# Altium PCB 96B垂直控制PCB-模拟电路.PcbDoc
Units mil, origin at the board's own origin, x right, y up, seen from the top; angles counter-clockwise.
Board outline 16035 x 9550 mil, 4 copper layers (Top Layer, MidLayer1, MidLayer2, Bottom Layer); 110 components, 82 nets, 410 pads, 11 vias.
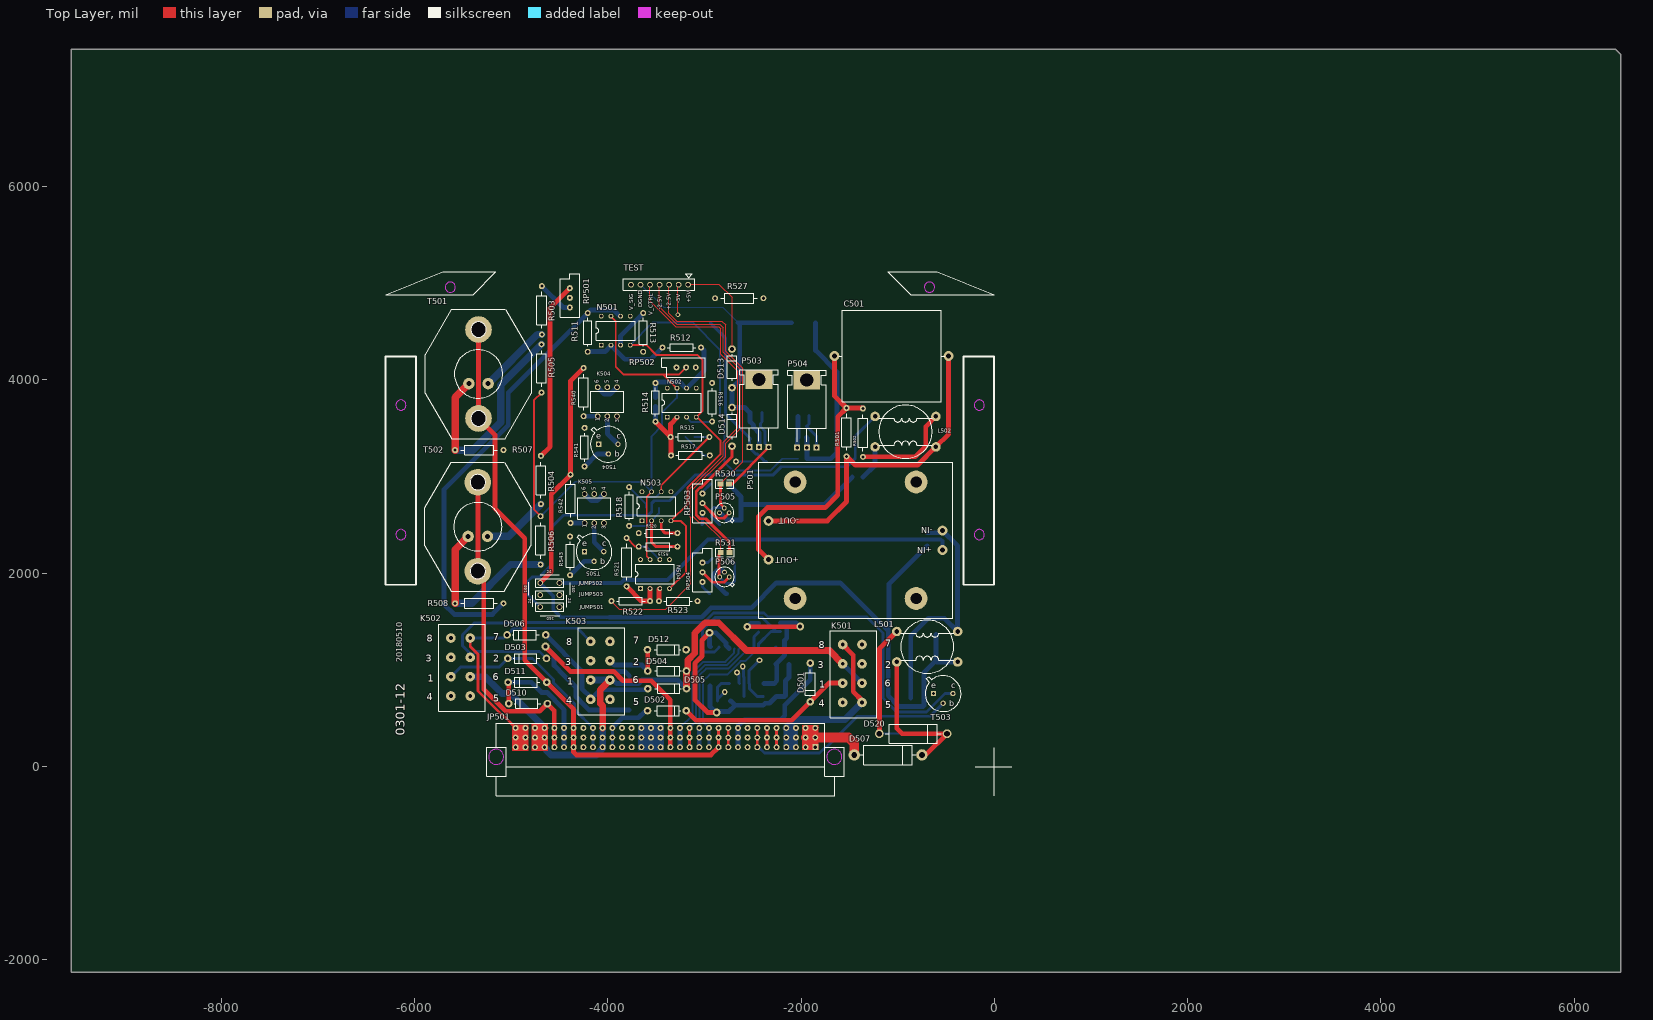
[diagram p0: Top Layer view]
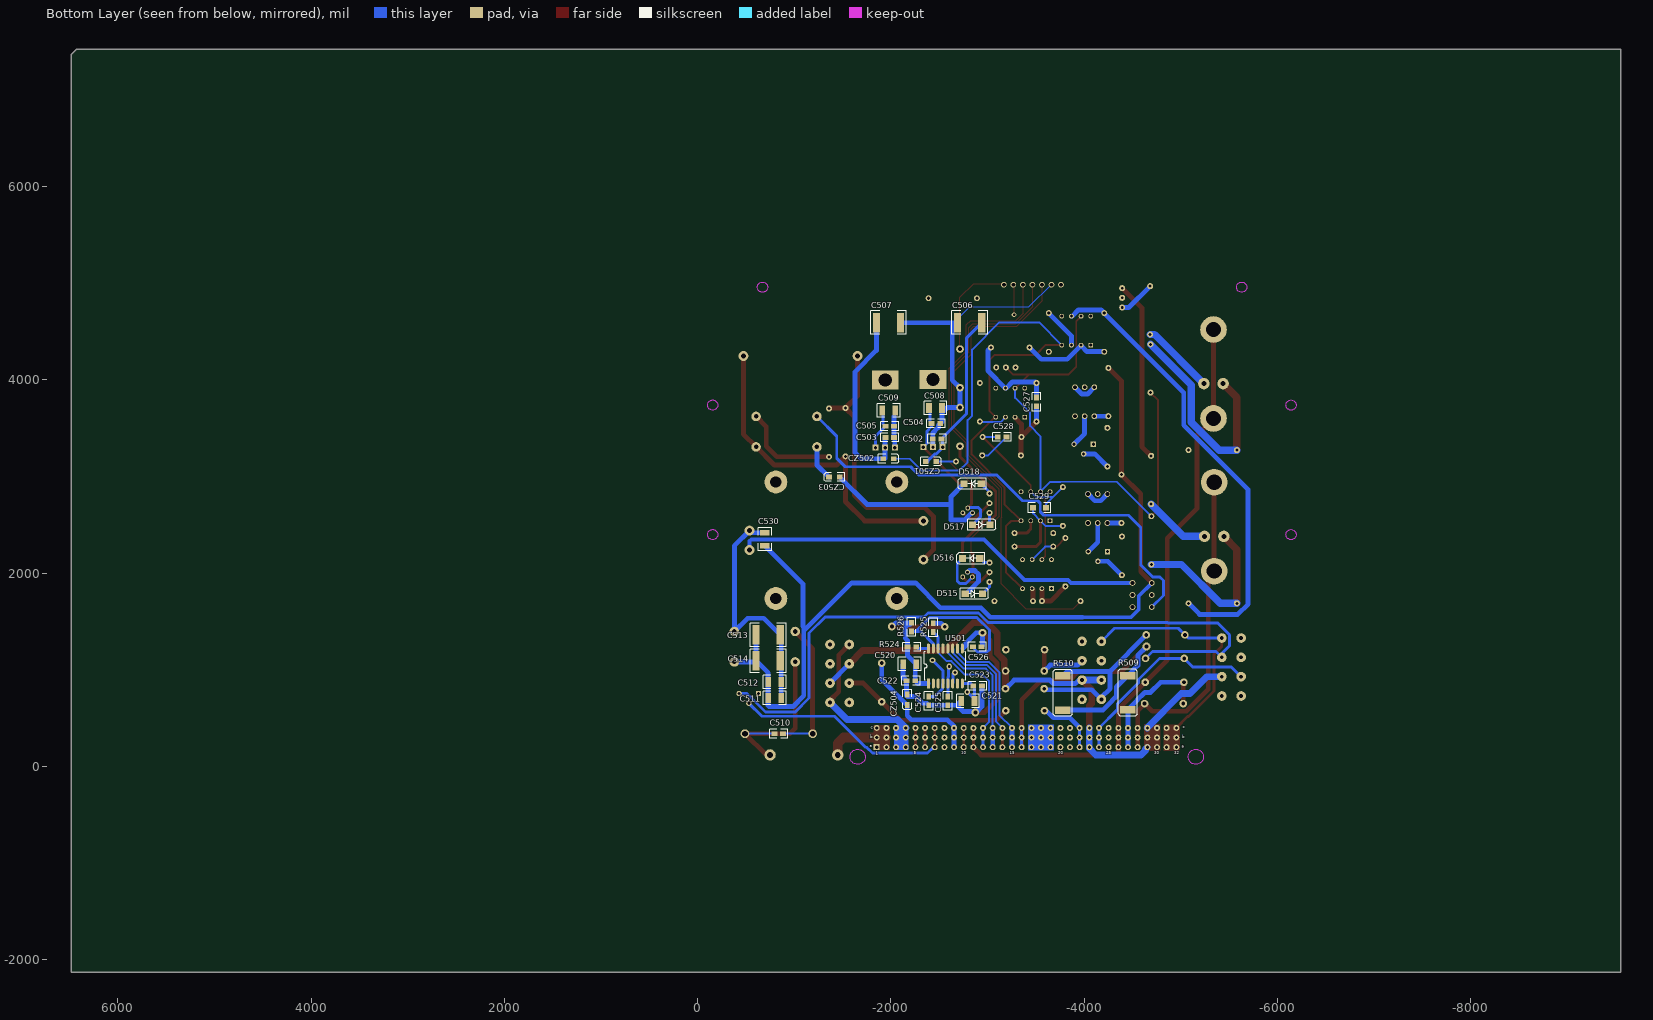
[diagram p1: Bottom Layer view, seen from below]
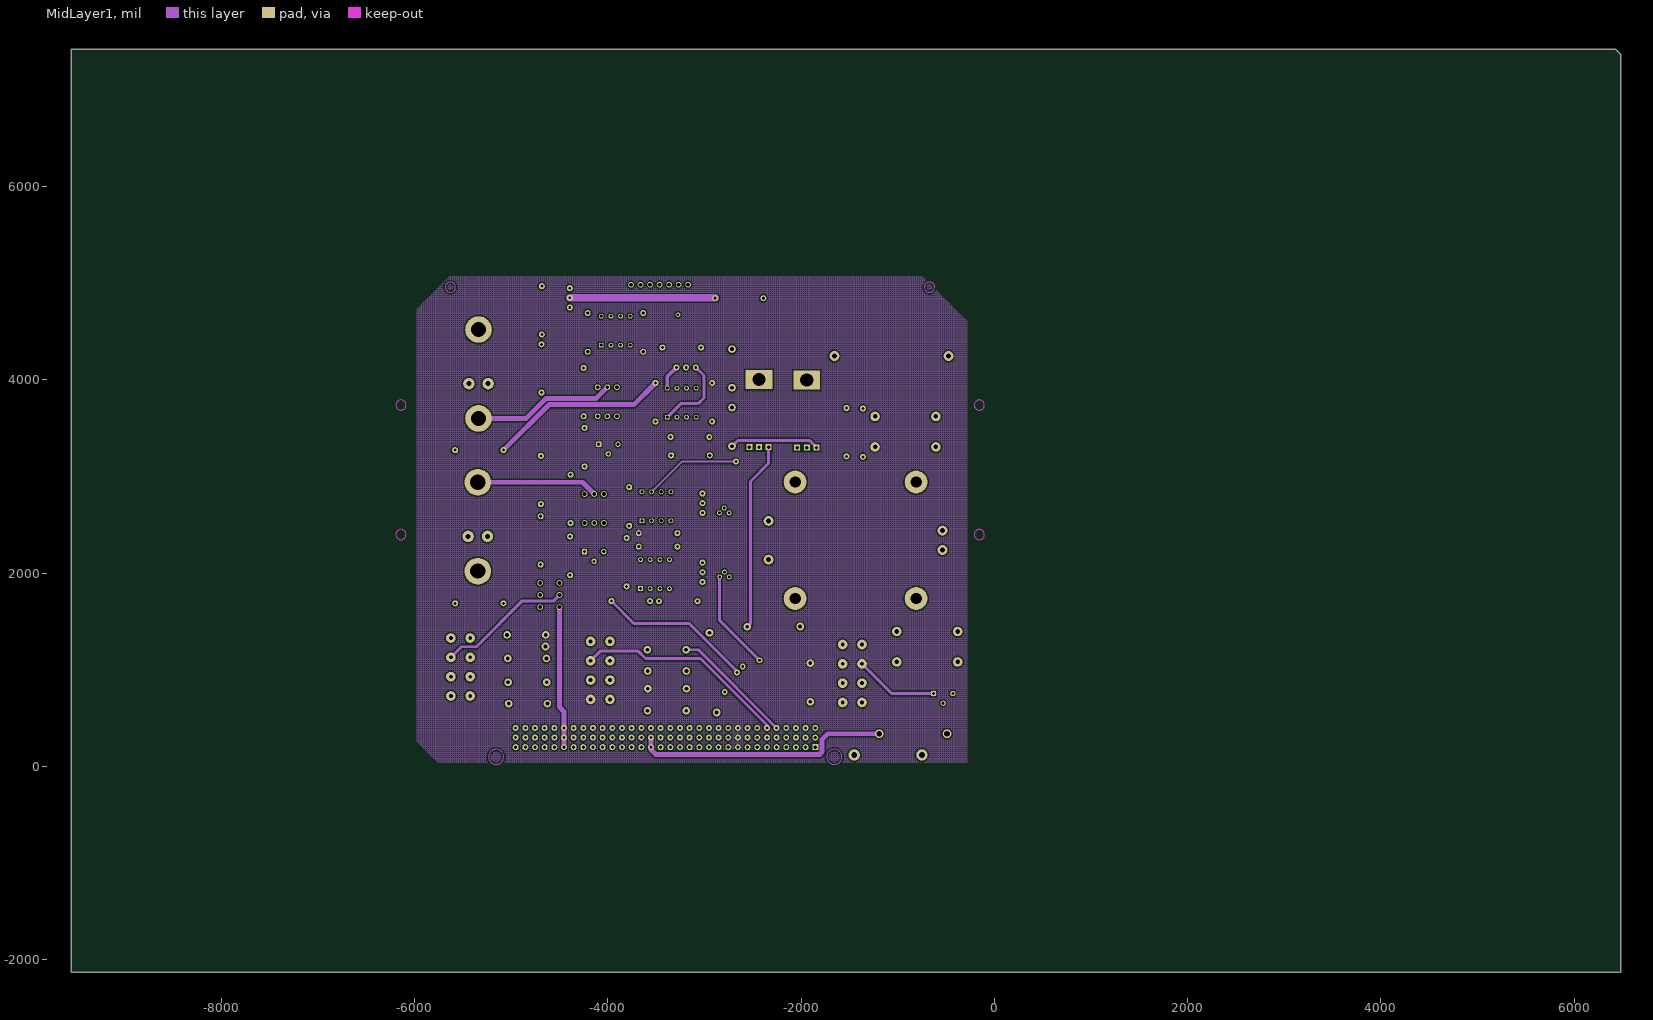
[diagram p2: MidLayer1]
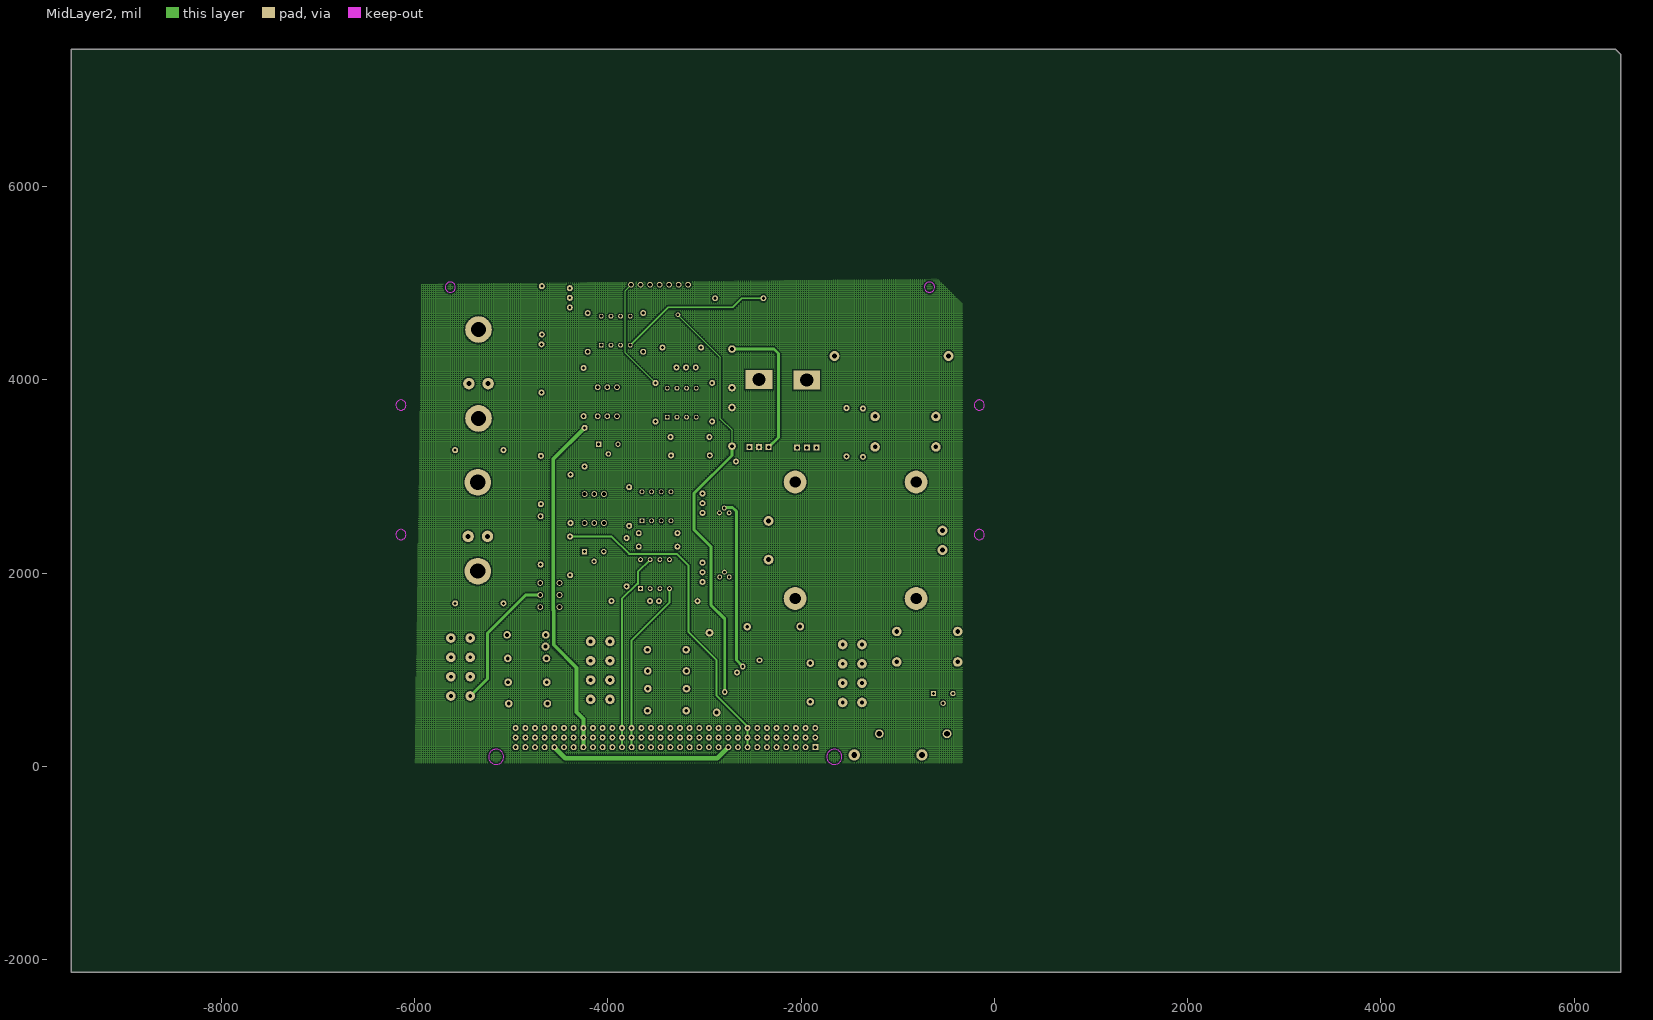
[diagram p3: MidLayer2]

## Layer stack, top to bottom
Top Solder: solder mask 0.4, Solder Resist, Dk 3.5
Top Layer: signal copper 1.4
Dielectric1: core 12.6, FR-4, Dk 4.8
MidLayer1: signal copper 1.4
Dielectric2: prepreg 12.6, FR-4, Dk 4.8
MidLayer2: signal copper 1.4
Dielectric3: core 12.6, FR-4, Dk 4.8
Bottom Layer: signal copper 1.4
Bottom Solder: solder mask 0.4, Solder Resist, Dk 3.5

## Board outline
-9553,-2127 -9553,7423 6427,7423 6482,7368 6482,-2127 -9553,-2127

## Design rules (kind name [scope] priority, off if disabled: settings)
Clearance [All] p1: gap=15 ignorepadtopadclearanceinfootprint=FALSE except(0: Arc-Hole Track-Hole SMDPad-Hole THPad-Hole Via-Hole Fill-Hole Poly-Hole Region-Hole Text-Hole)
FabricationTestpoint [(IsPad And (OnTopLayer Or OnBottomLayer))] p1: side=3 testpointundercomponent=TRUE minsize=40 maxsize=100 preferedsize=60 minholesize=0 maxholesize=40 preferedholesize=32 testpointgrid=1 allowsidetop=TRUE allowsidebottom=TRUE usegrid=TRUE gridtolerance=0.01
HoleSize [All] p1: absolutevalues=TRUE maxlimit=393.7 minlimit=1 maxpercent=80.000 minpercent=20.000
PolygonConnect [All] p1: connectstyle=Relief reliefconductorwidth=10 reliefentries=4 polygonreliefangle="90 Angle" airgapwidth=10
RoutingVias [All] p1: holewidth=28 width=50 viastyle="Through Hole" minholewidth=28 minwidth=50 maxholewidth=393.7 maxwidth=787.4
SilkToSolderMaskClearance [IsPad] p1 off: minsilkscreentomaskgap=10 clearancetoexposedcopper=TRUE
SolderMaskExpansion [All] p1: expansion=4
Width [All] p1: maxlimit=157.48 minlimit=10 preferedwidth=10
27 further rules are at their usual default settings.

## Components (designator, comment, footprint, x,y, rotation, side; value= is the part's Value field where it differs from the comment)
C501 "C401-400V-2μF±5%" C400V2U -474,4248 r180 top
C502 "CT41-0805-2R1-50V-105K" 0805 -2433,3391 r180 bottom
C503 "CT41-0805-2R1-50V-105K" 0805 -1942.4,3405 r180 bottom
C504 "CT41-0805-2R1-50V-105K" 0805 -2512,3551 r0 bottom
C505 "CT41-0805-2R1-50V-105K" 0805 -1942.4,3521 r180 bottom
C506 "CT41-2220-2R1-50V-226K" 2220 -2940,4592 r0 bottom
C507 "CT41-2220-2R1-50V-226K" 2220 -2101,4592 r0 bottom
C508 "CT41-1210-2R1-50V-106K" 1210 -2395,3710 r180 bottom
C509 "CT41-1210-2R1-50V-106K" 1210 -2045,3685 r0 bottom
C510 "CT41-0805-2R1-50V-105K" 0805 -794.51,339.99 r180 bottom
C511 "CT41-1210-2R1-50V-475K" 1210 -730,710 r180 bottom
C512 "CT41-1210-2R1-50V-475K" 1210 -865,875 r0 bottom
C513 "CT4901-2220P2-2C1-63V-336M-L5.0" 2220 -604.68,1365.08 r180 bottom value=47u/64V
C514 "CT4901-2220P2-2C1-63V-336M-L5.0" 2220 -604.68,1095.08 r180 bottom value=47u/64V
C520 "CT41-1210-2R1-50V-106K" 1210 -2261.95,1058.98 r0 bottom
C521 "CT41-1210-2R1-50V-106K" 1210 -2728.95,678.98 r180 bottom
C522 "CT41-0805-2R1-50V-104K" 0805 -2251.95,886.98 r0 bottom
C523 "CT41-0805-2R1-50V-104K" 0805 -2941.95,833.98 r0 bottom
C524 "CT41-0805-2R1-50V-104K" 0805 -2391.95,724.98 r270 bottom
C525 "CT41-0805-2R1-50V-104K" 0805 -2588.95,632.98 r90 bottom
C526 "CT41-0805-2R1-50V-104K" 0805 -2938.95,1238.98 r0 bottom
C527 "CT41-0805-2R1-50V-104K" 0805 -3506.92,3819 r270 bottom
C528 "CT41-0805-2R1-50V-105K" 0805 -3195.49,3410.01 r0 bottom
C529 "CT41-1206-2R1-50V-155K" 1206 -3605.92,2678 r0 bottom
C530 "CT41-1210-2R1-50V-475K" 1210 -695,2285 r90 bottom
CZ501 "MLCB2B3216-122B" MLCB2B3216 -2470,3155 r0 bottom
CZ502 "MLCB2B3216-122B" MLCB2B3216 -2030.4,3185 r0 bottom
CZ503 "MLCB2B3216-122B" MLCB2B3216 -1360,2995 r180 bottom
CZ504 "MLCB2B3216-122B" MLCB2B3216 -2168.95,635.98 r90 bottom
D501 "1N4007" DO-0.4 -1905,1070 r270 top
D502 "1N4007" DO-0.4 -3589,578 r0 top
D503 "1N4007" DO-0.4 -4635,1119 r180 top
D504 "1N4007" DO-0.4 -3587,989 r0 top
D505 "1N4007" DO-0.4 -3586,806 r0 top
D506 "1N4007" DO-0.4 -4642,1362 r180 top
D507 "P600D" P600D -1450,120 r0 top
D510 "1N4007" DO-0.4 -4625,651 r180 top
D511 "1N4007" DO-0.4 -4632,872 r180 top
D512 "1N4007" DO-0.4 -3590,1209 r0 top
D513 "1N4007" DO-0.4 -2715,3920 r90 top
D514 "1N4007" DO-0.4 -2715,3315 r90 top
D515 "LL4148(LL-34)" D-LL34 -2769,1788 r180 bottom
D516 "LL4148(LL-34)" D-LL34 -2920,2154 r0 bottom
D517 "LL4148(LL-34)" D-LL34 -2845,2502 r180 bottom
D518 "LL4148(LL-34)" D-LL34 -2936,2926 r0 bottom
D520 "1.5KE39A" DIODE-0.7 -840,340 r0 top
JP501 "6032-C096MS-1C1" AMP-174111-1 -1653.54,100 r0 top
JUMP501 "JP" JP -4700,1650 r0 top
JUMP502 "JP" JP -4700,1900 r0 top
JUMP503 "JP" JP -4500,1775 r180 top
K501 "JZC-078M/027-01-II" JZC-078M -1570,863 r0 top
K502 "JZC-078M/027-01-II" JZC-078M -5624,930 r0 top
K503 "JZC-078M/027-01-II" JZC-078M -4178,895 r0 top
K504 "JGW-5215MA" JGW-5215MA -4105,3625 r90 top
K505 "JGW-5215MA" JGW-5215MA -4240,2520 r90 top
L501 "GM10" GM10 -695,1240 r0 top
L502 "GM10" GM10 -920,3465 r180 top
N501 "G7FOP07MJ" DIP8 -4067.92,4360 r90 top
N502 "G7FOP07MJ" DIP8 -3385,3615 r90 top
N503 "G7FOP07MJ" DIP8 -3646.92,2543 r90 top
N504 "G7FOP07MJ" DIP8 -3661.92,1841 r90 top
P501 "MD10CW24S160ED" MD10CW24S160ED -2062,2944 r180 top
P503 "G7W7805(TO257)" "TO-220H - MODIFY" -2410,3655 r0 top
P504 "G7W7905(TO257)" "TO-220H - MODIFY" -1914.4,3650 r0 top
P505 "LM136AH-2.5" TO-46 -2745,2625 r0 top
P506 "LM136AH-2.5" TO-46 -2743,1962 r0 top
R501 "RJ15-0.5W-200KΩ±5%" RES-0.5W -1530,3210 r90 top
R502 "RJ15-0.5W-100Ω±5%" RES-0.5W -1360,3705 r270 top
R503 "RJ15-0.5W-160Ω±5%" RES-0.5W -4683,4471 r90 top
R504 "RJ15-0.5W-160Ω±5%" RES-0.5W -4693,3215 r270 top
R505 "RJ15-0.5W-62KΩ±5%" RES-0.5W -4686,4369 r270 top
R506 "RJ15-0.5W-62KΩ±5%" RES-0.5W -4695,2590 r270 top
R507 "RJ15-0.5W-4.7KΩ±5%" RES-0.5W -5080,3274 r180 top
R508 "RJ15-0.5W-4.7KΩ±5%" RES-0.5W -5080,1689 r180 top
R509 "RJ75 - 0.5W-200kΩ±0.1%" RJ75-0.5W -4451,587 r90 bottom
R510 "RJ75 - 0.5W-12kΩ±0.1%" RJ75-0.5W -3778,584 r90 bottom
R511 "RJ14-0.25W-33K±5%" RES-0.25W -4207.92,4292 r90 top
R512 "RJ14-0.25W-33K±5%" RES-0.25W -3035,4335 r180 top
R513 "RJ14-0.25W-16K±5%" RES-0.25W -3633.92,4292 r90 top
R514 "RJ14-0.25W-150KΩ±5%" RES-0.25W -3506.92,3569 r90 top
R515 "RJ14-0.25W-150KΩ±5%" RES-0.25W -2950,3410 r180 top
R516 "RJ14-0.25W-10KΩ±5%" RES-0.25W -2920,3970 r270 top
R517 "0" RES-0.25W -2945,3220 r180 top
R518 "RJ14-0.25W-15KΩ±5%" RES-0.25W -3778.92,2491 r90 top
R519 "RJ14-0.25W-10KΩ±5%" RES-0.25W -3280,2275 r180 top
R520 "RJ14-0.25W-6.2KΩ±5%" RES-0.25W -3680,2415 r0 top
R521 "RJ15-0.5W-200KΩ±5%" RES-0.5W -3805,1865 r90 top
R522 "RJ14-0.25W-100KΩ±5%" RES-0.25W -3963,1712 r0 top
R523 "RJ14-0.25W-51KΩ±5%" RES-0.25W -3070.92,1711 r180 top
R524 "RMK2012(0805)-K-B-512-F" 0805 -2261.95,1235.98 r0 bottom
R525 "RMK2012(0805)-K-B-512-F" 0805 -2438.95,1391.98 r90 bottom
R526 "RMK2012(0805)-K-B-512-F" 0805 -2213.95,1396.98 r90 bottom
R527 "RJ16S-1W-470Ω±5%" RJ16S-1W -2390,4846 r180 top
R530 "RMK2012(0805)-K-B-252-F" 0805 -2745,2925 r180 top
R531 "RMK2012(0805)-K-B-252-F" 0805 -2742,2215 r180 top
R540 "RJ15-0.5W-2KΩ±5%" RES-0.5W -4250,4125 r270 top
R541 "RJ14-0.25W-3.3KΩ±5%" RES-0.25W -4240,3505 r270 top
R542 "RJ15-0.5W-2KΩ±5%" RES-0.5W -4385,3020 r270 top
R543 "RJ14-0.25W-3.3KΩ±5%" RES-0.25W -4390,2380 r270 top
RP501 "TC183-X-100Ω" VR5 -4393,4750 r90 top
RP502 "TC183-W-20KΩ" VR5 -3090,4130 r180 top
RP503 "TC183-W-10KΩ" VR5 -3020,2625 r90 top
RP504 "TC183-W-10KΩ" VR5 -3020,1910 r90 top
T501 "3DD4H-T" 3DD4H-T -5338,4062 r90 top
T502 "3DD4H-T" 3DD4H-T -5345,2482 r90 top
T503 "3DG182J(绿点)" T039 -530,755 r0 top
T504 "3DG182J(绿点)" T039 -3995,3335 r0 top
T505 "3DG182J(绿点)" T039 -4142,2224 r0 top
TEST "TEST-POINT" TEST-POINT -3169,4986 r180 top
U501 "DAC7614UB" DAC7614[SOIC] -2388.95,858.98 r90 bottom

## Footprints (in the part's own frame and the unit in brackets; to place one, negate y for a bottom-side part, rotate by r counter-clockwise, add the part's x,y. Pads: shape width x height; smd on the part's side, far side on the other; paste and mask are expansions set on the pad)
3DD4H-T [mm] "3DD4H-T"
  round 7 hole 4: 1(-11.684,0) 1(11.684,0)
  round 3 hole 1.3: 2(-2.54,2.54) 3(-2.54,-2.54)
  silkscreen extent -17,-14.07 17,14.02
0805 [mil]
  rect 60x50 smd: 1(0.49,0.01) 2(90.49,0.01)
  silkscreen extent -50,-45 140,45
1206 [mil]
  rect 60x60 smd: 1(0,0) 2(135,0)
  silkscreen extent -50,-50 185,50
1210 [mil]
  rect 60x100 smd: 1(0,0) 2(135,0)
  silkscreen extent -50,-70 185,70
2220 [mil]
  rect 75x200 smd: 1(0.32,-0.08) 2(250.32,-0.08)
  silkscreen extent -60,-125 310,120
AMP-174111-1 [mil] "AMP-174111-1"
  rect 62x62 hole 32: 1A(-200,100)
  round 62 hole 32: 1B(-200,200) 1C(-200,300) 2A(-300,100) 2B(-300,200) 2C(-300,300) 3A(-400,100) 3B(-400,200) 3C(-400,300) 4A(-500,100) 4B(-500,200) 4C(-500,300) 5A(-600,100) 5B(-600,200) 5C(-600,300) 6A(-700,100) 6B(-700,200) 6C(-700,300) 7A(-800,100) 7B(-800,200) 7C(-800,300) 8A(-900,100) 8B(-900,200) 8C(-900,300) 9A(-1000,100) 9B(-1000,200) 9C(-1000,300) 10A(-1100,100) 10B(-1100,200) 10C(-1100,300) 11A(-1200,100) 11B(-1200,200) 11C(-1200,300) 12A(-1300,100) 12B(-1300,200) 12C(-1300,300) 13A(-1400,100) 13B(-1400,200) 13C(-1400,300) 14A(-1500,100) 14B(-1500,200) 14C(-1500,300) 15A(-1600,100) 15B(-1600,200) 15C(-1600,300) 16A(-1700,100) 16B(-1700,200) 16C(-1700,300) 17A(-1800,100) 17B(-1800,200) 17C(-1800,300) 18A(-1900,100) 18B(-1900,200) 18C(-1900,300) 19A(-2000,100) 19B(-2000,200) 19C(-2000,300) 20A(-2100,100) 20B(-2100,200) 20C(-2100,300) 21A(-2200,100) 21B(-2200,200) 21C(-2200,300) 22A(-2300,100) 22B(-2300,200) 22C(-2300,300) 23A(-2400,100) 23B(-2400,200) 23C(-2400,300) 24A(-2500,100) 24B(-2500,200) 24C(-2500,300) 25A(-2600,100) 25B(-2600,200) 25C(-2600,300) 26A(-2700,100) 26B(-2700,200) 26C(-2700,300) 27A(-2800,100) 27B(-2800,200) 27C(-2800,300) 28A(-2900,100) 28B(-2900,200) 28C(-2900,300) 29A(-3000,100) 29B(-3000,200) 29C(-3000,300) 30A(-3100,100) 30B(-3100,200) 30C(-3100,300) 31A(-3200,100) 31B(-3200,200) 31C(-3200,300) 32A(-3300,100) 32B(-3300,200) 32C(-3300,300)
  silkscreen extent -3600,-400 100,350
C400V2U [mil] "C401-400V-2μFJ"
  round 102 hole 51: 1(0,0) 2(1181,0)
  silkscreen extent 41,-472 1139,473
D-LL34 [mm]
  rect 1.9x1.8 smd: 1(0,0) 2(4.572,0)
  silkscreen extent -1.28,-1.5 6.1,1.5
DAC7614[SOIC] [mm]
  rect 2.6x0.8 smd: 1(0,0)
  oval 2.6x0.8 smd: 2(0,-1.27) 3(0,-2.54) 4(0,-3.81) 5(0,-5.08) 6(0,-6.35) 7(0,-7.62) 8(0,-8.89) 9(9.2,-8.89) 10(9.2,-7.62) 11(9.2,-6.35) 12(9.2,-5.08) 13(9.2,-3.81) 14(9.2,-2.54) 15(9.2,-1.27) 16(9.2,0)
  silkscreen extent 0.8,-9.72 8.4,1.09
DIODE-0.7 [mm] "Zener Diode; 2 Leads"
  round 2.3 hole 1.5: 1(-8.89,0) 2(8.89,0)
  silkscreen extent -7.37,-2.54 7.37,2.54
DIP8 [mil]
  rect 50x50 hole 32: 1(0,0)
  round 50 hole 32: 2(0,-100) 3(0,-200) 4(0,-300) 5(300,-300) 6(300,-200) 7(300,-100) 8(300,0)
  silkscreen extent 50,-350 250,50
DO-0.4 [mm]
  round 2 hole 1: 1(0,0) 2(10.16,0)
  silkscreen extent 1.78,-1.27 8.76,1.27
GM10 [mm]
  round 2.5 hole 1.2: 1(-8,-4) 2(8,-4) 3(-8,4) 4(8,4)
  silkscreen extent -7,-7 7,7
JGW-5215MA [mm]
  round 1.5 hole 1: 1(0,0) 2(0,-2.54) 3(0,-5.08) 4(7.62,-5.08) 5(7.62,-2.54) 6(7.62,0)
  silkscreen extent 1.02,-6.84 6.6,1.76
JP [mm]
  round 1.5 hole 1: 1(0,0) 2(5.08,0)
  silkscreen extent -1.17,-1.12 6.25,1.12
JZC-078M [mm]
  round 2.524 hole 1: 1(0,0) 2(5.08,5.08) 3(0,5.08) 4(0,-5.08) 5(5.08,-5.08) 6(5.08,0) 7(5.08,10.16) 8(0,10.16)
  silkscreen extent -3.2,-9.12 8.99,13.74
MD10CW24S160ED [mm] "DC24V-DC160V力源兴达"
  round 6 hole 3: 0(-31.8,30.6) 0(-31.8,0) 0(0,30.6) 0(0,0)
  round 2.591 hole 1.295: 1(-38.735,17.865) 2(-38.735,12.76) 3(6.96,10.22) 4(6.96,20.405)
  silkscreen extent -41.38,-5.2 9.6,35.8
MLCB2B3216 [mil]
  rect 60x50 smd: 1(0,0) 2(110,0)
  silkscreen extent -50,-45 160,45
P600D [mm] "P600D"
  round 3 hole 1.5: 1(0,0) 2(17.78,0)
  silkscreen extent 1.52,-2.54 16.26,2.54
RES-0.5W [mil]
  round 62 hole 32: 1(0,0) 2(500,0)
  silkscreen extent 65,-50 440,50
RES-0.25W [mil]
  round 62 hole 32: 1(0,0) 2(400,0)
  silkscreen extent 55,-40 350,40
RJ16S-1W [mil]
  round 62 hole 32: 1(0,0) 2(500,0)
  silkscreen extent 65,-50 440,50
RJ75-0.5W [mm]
  rect 2x4 smd: 1(0,0) 2(9,0)
  silkscreen extent -1.65,-2.54 10.67,2.54
T039 [mm]
  round 1.4 hole 0.8: 1(2.54,0) 2(0,-2.54)
  rect 1.4x1.4 hole 0.8: 3(-2.54,0)
  silkscreen extent -4.7,-4.7 4.7,4.7
TEST-POINT [mm]
  round 1.5 hole 1: 1(0,0) 2(2.5,0) 3(5,0) 4(7.5,0) 5(10,0) 6(12.5,0) 7(15,0)
  silkscreen extent -1.78,-2.82 17.02,1.52
TO-46 [mil]
  round 50 hole 28: 1(0,0) 2(-50,50) 3(-100,0)
  silkscreen extent -150,-100 50,100
"TO-220H - MODIFY" [mm]
  rect 7x5 hole 3.5: 0(-0.66,8.88)
  rect 1.575x1.575 hole 0.889: 1(-3.2,-8.9) 2(-0.66,-8.9) 3(1.88,-8.9)
  silkscreen extent -5.74,-7.38 4.42,11.42
VR5 [mil]
  round 62 hole 28: 1(0,0) 2(100,0) 3(200,0)
  silkscreen extent -100,-100 350,100

## Part data
C501: library part CaP1
C502 C504 C505: library part Cap_X_1, "1uF"
C503: library part Cap_X_1
C506 C507: library part Cap_Pol, "22uF"
C508 C509: library part Cap_Pol, "10uF"
C510: library part CAP, "1uF"
C511 C512: library part CAP, "4.7uF"
C513 C514: library part "Cap Pol2", "33uF", LatestRevisionDate=17-Jul-2002, LatestRevisionNote="Re-released for DXP Platform.", PackageReference=POLAR0.8, Published=8-Jun-2000, Publisher="Altium Limited"
C520 C521: library part Cap_X_2, "10uF"
C522 C523 C524 C525 C526 C527: library part Cap_X_2, "0.1uF"
C528: library part Cap_X_2, "1uF"
C529: library part Cap_X_2, "1.5uF"
C530: library part Cap_X_2
CZ501 CZ502 CZ503 CZ504: library part CZH
D515 D516 D517 D518: library part IN4148, "SMK4148(LL-34)"
D520: library part "Diode 11DQ03", "Schottky Rectifier", Code_JEDEC=DO-204-AL, ComponentLink1Description="Manufacturer Link", ComponentLink1URL=http://www.irf.com/, ComponentLink2Description=Datasheet, ComponentLink2URL=http://www.irf.com/product-info/datasheets/data/11dq03.pdf, DatasheetDocument=Dec-1997, LatestRevisionDate=17-Jul-2002, LatestRevisionNote="Re-released for DXP Platform.", PackageReference=DO-204AL, Published=8-Jun-2000, Publisher="Altium Limited"
JP501: library part AMP-174111-1
K501 K502 K503: library part Relay-DPDT
L501 L502: library part L-GONGMO
P501: "力源兴达，电源引脚做反了"
P503: library part MC7805T
P504: library part MC7905T
R501 R502 R503 R540 R542: library part R-0.5W
R504: library part Rx, "RJ15-0.5W-180Ω±5%-±100×10-6/K-SJ/T10872-2000"
R505 R506: library part Rx, "RJ15-0.5W-62KΩ±5%-±100×10-6/K-SJ/T10872-2000"
R507 R508: library part Rx
R509: library part R-0.5W, "RJ75 - 0.5W-200kΩ±0.1%±25×10^-6/K - GJB1929-1994"
R510: library part R-0.5W, "RJ75 - 0.5W-12kΩ±0.1%±25×10^-6/K - GJB1929-1994"
R511 R512 R513 R514 R515 R516 R517 R518 R519 R520 R521 R522 R523 R541 R543: library part R-0.25W
R524 R525 R526: library part RES2, "5.1K"
R527: library part R-5W
R530 R531: library part RES2, "2.5K"
RP501 RP502 RP503 RP504: library part Rp
T501 T502: "GB4314-84"
T503 T504 T505: library part 3DG182
U501: library part DAC7614

## Via types
v1: diameter 60, hole 30, Top Layer to Bottom Layer, 5 vias
v2: diameter 80, hole 40, Top Layer to Bottom Layer, 5 vias
v3: diameter 50, hole 28, Top Layer to Bottom Layer, 1 vias

## Nets (pads, with @x,y where several pads share a name; then routed paths per layer and width w, separated by ;. In a path a pad name is that pad's centre, name@x,y a point inside that pad or via, vN(x,y) a via of type N, cw(c..) or ccw(c..) an arc to the next point about the centre after c; other vN are vias at no path point)
12L1_1: D511.1 JP501.11A JP501.11B JP501.11C JP501.26A JP501.26B JP501.26C K504.5 T501.1 | length 7994
  Top Layer w30: JP501.11A JP501.11B JP501.11C
  Top Layer w50: T501.1@-5338,4522 -5338,3602 -5166,3430 -5166,2669 -4860,2363 -4860,1100 D511.1 -4353.54,593.54 JP501.26C JP501.26B JP501.26A -4353.54,148.54 -4325,120 -2933.13,120 -2853.54,199.59 JP501.11A
  MidLayer1 w50: T501.1@-5338,3602 -4843.92,3602 -4635.92,3810 -4120,3810 K504.5 ; JP501.26A@-4353.54,199.59 JP501.26A ; JP501.11A@-2853.54,199.59 JP501.11A
12L2_1: D510.1 JP501.10A JP501.10B JP501.10C JP501.28A JP501.28B JP501.28C K505.5 T502.1 | length 6786.9
  Top Layer w30: JP501.10A JP501.10B JP501.10C
  Top Layer w50: T502.1@-5345,2942 -5345,2022 -5284,1961 -5284,797.75 -5057.88,571.63 -4704.37,571.63 D510.1 -4553.54,579.54 JP501.28C JP501.28B JP501.28A
  MidLayer1 w50: T502.1@-5345,2942 -4262,2942 K505.5
  MidLayer2 w50: JP501.28A -4553.54,199.59 -4438.95,85 -2868.13,85 -2753.54,199.59 JP501.10A
12L_H: D510.2 D511.2 JP501.27A JP501.27B JP501.27C JUMP501.2 R509.1 | length 2799.6
  Top Layer w30: D511.2 D511.2@-5025,865
  Top Layer w50: D510.2 D511.2@-5025,865 ; JP501.27A@-4453.54,199.59 JP501.27A
  MidLayer1 w50: JUMP501.2 -4500,615 -4453.54,568.54 JP501.27C JP501.27B JP501.27A
  Bottom Layer w30: D510.2@-5032,658 D510.2
  Bottom Layer w50: D510.2@-5033,643 D510.2 ; D511.2 -4790.74,872 -4684.74,766 -4627.75,766 -4545.63,683.88 -4545.63,681.63 R509.1 ; JP501.27A JP501.27B JP501.27C R509.1@-4453.54,584.46
26VGND: C510.2 D520.1 JP501.17A JP501.17B JP501.17C JP501.18A JP501.18B JP501.18C JP501.19A JP501.19B JP501.19C L501.3 | length 4215.3
  Top Layer w50: D520.1 -1190,1217.44 L501.3
  MidLayer1 w50: JP501.18B JP501.18A -3553.54,173.54 -3505,125 -1805,125 -1805,129.97 -1782.54,152.43 -1782.54,282.46 -1725,340 D520.1
  Bottom Layer w20: D520.1 C510.2
  Bottom Layer w50: JP501.18A JP501.18B
26VGND1: C511.2 C512.1 C513.2 C514.2 C530.2 L501.4 P501.2 | length 2537.6
  Bottom Layer w50: C511.2 C512.1 -865,1355 C513.2 -685,1535 -517.56,1535 L501.4 -380.04,2284.66 P501.2 -558.65,2420 C530.2
160V: C501.2 P501.4 R501.2 R502.1 | length 3106.2
  Top Layer w50: P501.4 -2440,2244.62 -2440,2590 -2350,2680 -1750,2680 -1620,2810 -1620,3620 R501.2 ; C501.2 -1655,3835 R501.2 ; -1445,3707.5 -1447.5,3710 ; R502.1 -1365,3710 -1447.5,3710 ; R501.2 -1447.5,3710
+2.5V: C525.2 D517.1 P505.2 R530.2 TEST.3 U501.5 | length 5445.9
  Top Layer w10: TEST.3@-3367.85,4991 -3367.85,4692.85 -3285,4610 -2820,4610 -2780,4570 -2780,4295 -2605,4120 -2605,3154.29 -2834.3,2924.99 R530.2
  Top Layer w30: R530.2 -2835.49,2715.49 P505.2
  MidLayer2 w30: P505.2 -2790,2680 -2709,2680 -2670,2641 -2670,1102 v1(-2604,1036)
  Bottom Layer w30: D517.1 -2929,2586 -2929,2655 -2904,2680 -2800,2680 P505.2 ; v1(-2604,1036) -2598,1030 -2598,931.25 -2588.95,922.2 U501.5 ; C525.2 U501.5@-2588.94,858.97
+5V: C504.2 C508.1 C520.1 C522.1 D513.2 P503.3 R524.2 R525.2 R526.2 R530.1 TEST.1 U501.1 | length 7214.5
  Top Layer w10: TEST.1@-3171,4991 -2851,4991 -2715,4855 D513.2
  Top Layer w30: R530.1 -2711.17,2924.99 -2335.98,3300.18 P503.3
  Top Layer w50: v2(-2557,1446) -2012,1446 v2(-2010,1448)
  MidLayer1 w30: v2(-2557,1446) -2525,1478 -2525,2950 -2335.98,3139.02 P503.3
  MidLayer2 w30: D513.2 -2282,4320 -2235,4273 -2235,3405.59 P503.3
  Bottom Layer w30: C508.1@-2404,3662 -2404,3568.5 C504.2 -2421.51,3517.2 -2373.49,3469.18 -2373.49,3343.61 -2374.98,3343.61 P503.3
  Bottom Layer w50: v2(-2557,1446) -2520.54,1482.46 R525.2 ; U501.1@-2383.2,858.98 -2279.45,858.98 C522.1 -2251.46,1048.49 C520.1 -2261.95,1060.54 -2171.46,1151.03 R524.2 -2171.46,1305.86 -2148.94,1328.38 -2148.94,1444.03 -2172.37,1467.46 -2193.94,1467.46 R526.2 -2049.46,1487.46 v2(-2010,1448)
+15V: CZ501.1 JP501.21A JP501.21B JP501.21C N501.7 N502.7 N503.7 N504.7 R505.2 R506.1 RP502.2 | length 9404.6
  Top Layer w20: R506.1 -4765,2660 -4765,3790 R505.2 ; N501.7 -3917.92,4610 -3917.92,4137.92 -3835,4055 -3425,4055 ; N504.7 -3596.92,2176 -3596.92,2793 N503.7 ; N502.7 -3425,4055 ; RP502.2 -3190,4129.59 -3264.59,4055 -3425,4055
  MidLayer1 w20: N503.7 -3234.92,3155 v1(-2675,3155)
  MidLayer2 w20: JP501.21A JP501.21B JP501.21C -3853.54,1734.74 -3697.28,1891 -3689,1891 -3689,2013.92 N504.7
  Bottom Layer w20: R506.1 -4338,2947 -3755.73,2947 -3753.73,2945 -3648.92,2945 N503.7 -3546.92,3418.08 -3440,3525 -3440,3660 -3285,3815 N502.7 ; v1(-2675,3155) CZ501.1
+26V: D507.1 JP501.1A JP501.1B JP501.1C JP501.2A JP501.2B JP501.2C | length 648.4
  Top Layer w100: JP501.2B JP501.1B -1510,300 -1450,240 D507.1
+26V*: C511.1 C512.2 C513.1 C514.1 C530.1 JUMP502.1 L501.2 R540.1 R542.1 | length 9751.7
  Top Layer w50: JUMP502.1 -4585,2015 -4585,2820 R542.1 -4385,3990 R540.1
  Bottom Layer w40: JUMP502.1 -4564.53,1764.53 -4564.53,1623.27 -4485.89,1544.63 -3985,1544.63
  Bottom Layer w50: -3985,1544.63 -3028.71,1544.63 -2930.88,1642.46 -2512.54,1642.46 -2255,1900 -1594.75,1900 -1099.17,1404.42 ; C530.1 -1090,1890 -1090,1452.78 -1099.17,1443.61 -1099.17,1404.42 ; C513.1 C514.1 ; L501.2 -592.52,1082.52 C514.1 ; -1099.17,1404.42 -1099.17,731.95 -987.22,620 -740,620 -730,630 C511.1 C512.2 -730,970 C514.1
+160V_D: JUMP501.1 L502.2 | length 5026.4
  Bottom Layer w30: JUMP501.1 -4820,1770 -4820,1925 -4785.47,1959.53 -4711.18,1959.53 -4650.71,2020 -4650,2020 -4585,2085 -4585,2475 -4460,2600 -3581.5,2600 -3545.92,2635.57 -3545.92,2724.08 -3520,2750 -3362.14,2750 -3097.14,3015 -2293.29,3015 -2206.18,3102.11 -1527.89,3102.11 -1440,3190 -1440,3417.44 L502.2
-2.5V: C524.1 D516.2 P506.3 R531.2 TEST.4 U501.4 | length 6071.6
  Top Layer w10: TEST.4@-3466.28,4991 -3466.28,4755.92 -3285.36,4575 -2840,4575 -2805,4540 -2805,4284.64 -2630,4109.64 -2630,3495 -2780,3345 -2780,3206.93 -3120,2866.93 -3120,2589.24 -3059.76,2529 -3000.5,2529 -2832.49,2360.99 R531.2 ; P506.3 -2843,2031.2
  Top Layer w30: P506.3 -2848,1967 -2848,2199.48 R531.2
  MidLayer1 w30: P506.3 -2843,1513 v1(-2430,1100)
  Bottom Layer w30: P506.3 -2775.91,1894.91 -2713.09,1894.91 -2687,1921 -2687,2101 D516.2 ; v1(-2430,1100) -2538.95,991.05 U501.4 -2534.7,854.72 -2534.7,804.59 -2454.59,724.49 C524.1
-5V: C505.1 C509.2 C521.2 C523.2 D514.1 P504.3 R531.1 TEST.2 U501.8 | length 7892.3
  Top Layer w10: v3(-3275,4675) -3275,4985.43 TEST.2@-3269.43,4991
  Top Layer w30: R531.1 -2742.49,2320.49 -2986,2564 -3045.27,2564 -3085,2603.73 -3085,2846.27 -3045.27,2886 -3034,2886 -2715,3205 D514.1
  MidLayer1 w30: D514.1 -2655,3375 -1911.35,3375 -1840.39,3304.03 P504.3
  MidLayer2 w10: v3(-3275,4675) -2835,4235 -2835,3600 -2715,3480 D514.1
  MidLayer2 w30: v1(-2790,770) -2790,1528.73 -2931.27,1670 -2931.27,2274.27 -3107,2450 -3107,2828 -2715,3220 D514.1
  Bottom Layer w30: C521.2 C521.2@-2863.95,696.05 ; v1(-2790,770) C521.2@-2863.95,696.05 ; U501.8 -2826.45,858.98 C523.2 -2863.95,821.48 C521.2@-2863.95,696.05 ; -1918.4,3633 -1918.4,3545.5 C505.1 -1840.39,3418.5 P504.3
-15V: CZ502.1 JP501.20A JP501.20B JP501.20C N501.4 N502.4 N503.4 N504.4 R527.1 | length 10278.8
  Top Layer w20: N501.4 -3764.92,4363 -3604.51,4363 -3501.51,4260 -3075,4260 -3019,4204 -3019,3681 N502.4 -3075.8,3615 -2835,3374.2 -2835,3229.72 -3175,2889.72 -3175,2714.92 N503.4 -3248,2543 -3190,2485 -3190,2012.92 N504.4
  MidLayer2 w20: N501.4 -3375.42,4752.5 -2705.5,4752.5 -2612,4846 R527.1 ; JP501.20A JP501.20B JP501.20C -3753.54,1305 -3361.92,1696.62 N504.4
  Bottom Layer w20: N501.4 -3532.92,4595 -3120,4595 -2839.37,4314.37 -2839.37,3629.11 -2794.37,3584.11 -2794.37,3149.37 -2710,3065 -2661.51,3065 -2313.99,3065.01 -2194,3185 CZ502.1 CZ502.1@-2029.91,3184.99
AGND: CZ503.1 CZ504.1 D501.1 D505.1 D506.1 JP501.9A JP501.9B JP501.9C K501.2 K503.4 L502.4 R510.2 R513.1 R516.1 R520.1 T503.3 T504.3 T505.3 | length 4667.5
  Top Layer w50: K501.2 K501.2@-1370,1083.63
  MidLayer1 w30: K501.2 -1062,755 T503.3
  Bottom Layer w50: D506.1 -4267.69,987.69 ; R510.2 -3824.35,984.69 -4264.69,984.69 -4267.69,987.69 ; D505.1 -3586,794 -3655.73,794 -3655.77,793.96 -3933.97,793.96 -3934.01,794 -4079,794 K503.4 -4178,715.63 -4267.69,805.31 -4267.69,987.69 ; JP501.9A JP501.9B JP501.9C -2653.54,416.46 -2585,485 -2210,485 -2168.95,526.05 CZ504.1 -2167.38,635.98 -1905,898.36 D501.1 ; CZ503.1 -1234.96,3120.04 L502.4
BK: JP501.6A JP501.6B JP501.6C K503.3 | length 2411.1
  Top Layer w30: JP501.6A JP501.6B JP501.6C
  MidLayer1 w30: K503.3 -4079,1194 -3686,1194 -3609,1117 -3042,1117 -2353.54,428.54 JP501.6C
DGND: C502.1 C503.2 C504.1 C505.2 C506.2 C507.1 C508.2 C509.1 C520.2 C521.1 C522.2 C523.1 C524.2 C525.1 C526.1 CZ503.2 CZ504.2 D513.1 D514.2 D515.1 D518.2 P503.2 P504.1 P505.3 P506.2 R523.1 TEST.6 U501.9 | length 8854.4
  Top Layer w50: v2(-2948.95,1383.98) -3025.63,1307.3 -3025.63,1140.92 -3099,1067.55 -3099,690 -2968,559 v2(-2874,559)
  Bottom Layer w10: TEST.6@-3663.13,4991 -3422.13,4750 -2810.6,4750 C506.2@-2652.6,4592
  Bottom Layer w30: C526.1 C526.1@-2938.46,1246.39 ; U501.9 U501.9@-2738.95,1226.88
  Bottom Layer w50: v2@-2948.95,1373.49 -2948.95,1249.46 C526.1 ; v2(-2948.95,1383.98) -2881.9,1383.98 -2778.46,1280.54 -2778.46,1254.94 U501.9@-2744.7,1221.18 ; C523.1 -2941.46,619.92 -2880.54,559 v2(-2874,559) ; P505.3 -2838.6,2625 -2765.6,2552 -2622,2552 -2622,2712 ; -2835.36,571 -2745.9,571 -2683.44,633.46 ; P506.2 -2797.04,2012 -2812.04,2027 -2869.92,2027 -2908,1988.92 -2908,1916.04 -2779.96,1788 D515.1 ; D518.2 -2622,2792 -2622,2712 ; C521.1 -2683.44,633.46 ; C525.1 -2683.44,633.46 ; C525.1@-2587.92,634.49 C524.2 ; P503.2 -2433.49,3307.1 C502.1 -2433.49,3451.4 -2491.51,3509.42 -2491.51,3530.99 C504.1 -2530,3569.48 -2530,3662 -2583,3715 D514.2 D513.1 -2635.63,3999.37 -2635.63,4575.03 -2652.6,4592 C507.1@-2101,4592 ; C524.2@-2392.98,633.46 C524.2 ; C520.2 -2126.95,921.48 C522.2 -2161.46,733.94 -2168.94,726.46 -2254.98,726.46 -2326.96,654.49 -2371.96,654.49 C524.2 ; P504.1 -2040.39,3397.51 C503.2 C505.2 -2032.89,3621.49 ; CZ503.2 -1753,2712 -2622,2712
FUS2: JP501.3A JP501.3B JP501.3C JP501.4A JP501.4B JP501.4C K501.5 K501.8 | length 1575.7
  Top Layer w50: K501.8 -1459.69,1152.69 -1459.69,773.31 -1370,683.63 K501.5
  Bottom Layer w50: JP501.3C JP501.3C@-2053.54,400.41
  Bottom Layer w75: JP501.4C -2066.54,487 -1546,487 K501.5
HIGH-IN3: D502.1 JP501.22A JP501.22B JP501.22C | length 638.5
  Bottom Layer w30: JP501.22A JP501.22B JP501.22C
  Bottom Layer w50: JP501.22C -3953.54,400.41 -3849.32,504.63 -3682.69,504.63 -3609.32,578 D502.1
HIGH-IN4: D504.2 D505.2 JP501.23A JP501.23B JP501.23C JP501.29A JP501.29B JP501.29C JP501.30A JP501.30B JP501.30C K501.3 K501.6 K502.6 K503.1 K503.6 | length 6186.6
  Top Layer w70: JP501.23C -4053.54,629.57 -4077.69,653.71 -4077.69,795.31 K503.6 ; D505.2 -3186,988 D504.2 -3174,1002 -3174,1098.61 -3100.63,1171.98 -3100.63,1380.37 -2993,1488 -2852,1488 -2564,1200 -1707,1200 K501.3
  Top Layer w75: -4712.82,400 JP501.29C
  Bottom Layer w50: K503.6 -3943.09,895 -3907.05,858.96 -3682.69,858.96 -3646.65,895 -3275,895 D505.2 ; K501.3 K501.6
  Bottom Layer w70: K502.6 -5268.74,930 -5095.74,757 -5004.61,757 -4653.54,405.93 JP501.29C ; JP501.29A -4634.54,181 -4634.54,166.45 -4587.09,119 -4119.99,119 -4053.54,185.45 JP501.23A JP501.23B JP501.23C ; K503.1 K503.6
HIGH-IN5: D503.2 JP501.24A JP501.24B JP501.24C K502.1 | length 2100.2
  Bottom Layer w30: K502.1 -5526,1028 -5126,1028 D503.2 -4780.9,1119 -4562.63,900.73 -4562.63,866.63 -4342.26,646.26 -4342.26,588.72 JP501.24C JP501.24B JP501.24A
HIGH-IN6: D506.2 JP501.31A JP501.31B JP501.31C JP501.32A JP501.32B JP501.32C K502.7 K503.8 | length 2475.5
  Top Layer w30: K502.7 -5424,1242.69 -5344.31,1163.01 -5344.31,780.29 -5080.66,516.63 -5070.17,516.63 JP501.32C
  Bottom Layer w30: K502.7 -5074,1330 D506.2 -4972.63,1431.37 -4314.37,1431.37 K503.8
HV_SAMPLE: JP501.16A JP501.16B JP501.16C R509.2 R510.1 | length 3472.4
  Top Layer w50: v2(-4646,1241) -4644.75,1241 -4388.44,984.69 -3940.85,984.69 -3843.17,887 -3549,887 -3353.54,691.54 JP501.16C JP501.16B JP501.16A
  Bottom Layer w30: JP501.16A JP501.16B JP501.16C
  Bottom Layer w50: v2(-4646,1241) -4644.75,1241 -4555.63,1151.88 -4555.63,1045.96 R509.2 -4332.69,823.02 -4332.69,724.58 -4287.26,679.15 -4287.26,677.43 -4193.83,584 R510.1
LOAD_DA: JP501.12A JP501.12B JP501.12C R525.1 U501.14 | length 1606.6
  Bottom Layer w20: JP501.12C -3016.63,463.09 -3016.63,882 -2946.63,952 -2765.78,952 -2626.78,1091 -2576.07,1091 -2488.95,1178.12 U501.14 U501.14@-2498.2,1211.93
  Bottom Layer w30: JP501.12A JP501.12B JP501.12C ; U501.14 -2488.95,1342.46 R525.1
LOGOUT2: JP501.7A JP501.7B JP501.7C T503.2 | length 2362.5
  Top Layer w30: JP501.7A JP501.7B JP501.7C
  Bottom Layer w30: JP501.7A -2439.81,200 -2378.81,139 -1810.12,139 -1749.12,200 -1737.54,200 -1417.54,520 -665,520 T503.2
LOGOUT6_limit_ctrl_UP: JP501.8A JP501.8B JP501.8C R543.1 | length 3482.5
  MidLayer2 w20: R543.1 -3960,2380 -3780,2200 -3285,2200 -3165,2080 -3165,1390 -2875,1100 -2875,735 -2553.54,413.54 JP501.8C JP501.8B JP501.8A
LOGOUT7_limit_ctrl_DOWN: JP501.25A JP501.25B JP501.25C R541.1 | length 3568.2
  MidLayer2 w40: JP501.25A JP501.25B JP501.25C -4253.54,493.54 -4322.5,562.5 -4322.5,1022.5 -4560,1260 -4560,1614.22 -4564.53,1618.74 -4564.53,3180.47 R541.1
LOW-IN5: D512.2 JP501.5A JP501.5B JP501.5C | length 1475.1
  Top Layer w30: JP501.5A JP501.5B JP501.5C JP501.5C@-2253.54,403.54
  MidLayer1 w30: D512.2 -3062.54,1209 JP501.5C
NetC501_1: C501.1 L502.3 P501.3 R501.1 | length 3392.9
  Top Layer w50: P501.3 -1728.36,2541.64 -1530,2740 R501.1 -1440,3120 -792.56,3120 L502.3 -474,3438.56 C501.1
NetC502_2: C502.2 C506.1 CZ501.2 P503.1 | length 1713.7
  Bottom Layer w30: C506.1@-2940,4592 -2784.37,4436.37 -2784.37,3651.89 C502.2 -2535.98,3378.51 P503.1 -2535.98,3300.18 -2468.23,3232.43 -2450,3232.43 -2386.38,3168.8 -2386.38,3155 CZ501.2
NetC503_1: C503.1 C507.2 CZ502.2 P504.2 | length 1991.5
  Bottom Layer w50: C503.1 -1940.39,3402.5 P504.2 CZ502.2@-1940.39,3185.46 ; CZ502.2@-1939.91,3184.99 -1694.01,3184.99 -1630,3249 -1630,4085 -1850.68,4305.68 C507.2
NetC510_1: C510.1 D507.2 D520.2 L501.1 | length 1886.4
  Top Layer w50: L501.1 -1009.96,394.96 -955,340 D520.2 -710,120 D507.2
  Bottom Layer w20: C510.1 D520.2
NetC526_2: C526.2 R526.1 U501.15 | length 1618.1
  Bottom Layer w30: C526.2@-2848.46,1230.56 C526.2@-2848.46,1231.54 ; C526.2 C526.2@-2848.46,1231.54 ; U501.15@-2439.7,1220.43 U501.15 -2438.95,1271.31 -2312.8,1397.46 -2256.51,1397.46 ; R526.1 -2256.51,1397.46 ; C526.2@-2848.46,1231.54 -2896.03,1183.97 -2994.97,1183.97 -3018.95,1207.95 -3018.95,1412.97 -2889.46,1542.46 -2401.51,1542.46 -2256.51,1397.46
NetC527_2: C527.2 N502.2 R514.1 R515.2 R517.2 | length 808.9
  Top Layer w50: R514.1@-3507.92,3568 R514.1 -3506.92,3566.92 R515.2 ; R517.2 -3345,3405 R515.2 ; N502.2 -3285,3608.43 -3350,3543.43 R515.2
  Bottom Layer w50: R514.1 C527.2
NetC528_1: C528.1 R517.1 | length 328.9
  Bottom Layer w20: C528.1 -3195,3409.64 -3005.36,3220 R517.1
NetC528_2: C528.2 C529.1 N503.6 R515.1 R518.2 | length 1465.4
  Top Layer w20: N503.6 -3446.92,2913.08 R515.1
  Bottom Layer w20: R518.2 -3677.92,2790 ; C529.1 -3605.92,2718 -3677.92,2790 ; N503.6 -3499.92,2790 -3677.92,2790 ; C528.2 R515.1
NetC529_2: C529.2 N503.2 R518.1 R519.1 | length 927.5
  Top Layer w30: N503.2 -3546.92,2321.92 -3500,2275 R519.1
  Bottom Layer w20: R518.1 -3598.92,2491 N503.2 -3470.92,2619 C529.2
NetD501_2: D501.2 D502.2 K501.1 | length 1819.1
  Top Layer w50: D502.2 -3090,479 -2096,479 D501.2 -1712,863 K501.1
NetD504_1: D504.1 D512.1 K503.2 | length 651.9
  Top Layer w50: D504.1 D512.1@-3587,1206
  Bottom Layer w50: K503.2 -3932.69,1049.69 -3647.69,1049.69 D504.1
NetD515_2: D515.2 RP504.1 | length 151.4
  Bottom Layer w30: RP504.1 -3020,1859 D515.2
NetD516_1: D516.1 RP504.3 | length 118.2
  Bottom Layer w30: RP504.3 -2964,2110 D516.1
NetD517_2: D517.2 RP503.1 | length 125.1
  Bottom Layer w30: D517.2 -3020,2507 RP503.1
NetD518_1: D518.1 RP503.3 | length 135.8
  Bottom Layer w30: RP503.3 -3020,2842 D518.1
NetJUMP502_2: JUMP502.2 P501.1 | length 4248.2
  Bottom Layer w40: JUMP502.2 -3863.34,1900 -3832.34,1931 -3384,1931 -2965,2350 -555,2350 -537.02,2332.02 P501.1
NetK504_1: K504.1 R540.2 | length 145
  Bottom Layer w50: R540.2 K504.1
NetK504_2: K504.2 T504.1 | length 335.6
  Bottom Layer w50: K504.2 -4005,3445 T504.1
NetK504_4: K504.4 K504.6 | length 258
  Bottom Layer w50: K504.6 -4035,3855 -3975,3855 K504.4
NetK505_1: K505.1 R542.2 | length 145
  Bottom Layer w50: R542.2 K505.1
NetK505_2: K505.2 T505.1 | length 336.6
  Bottom Layer w50: K505.2 -4140,2322 T505.1
NetK505_4: K505.4 K505.6 | length 257.6
  Bottom Layer w50: K505.6 -4170.47,2750.47 -4111.2,2750.47 -4041.67,2820 K505.4
NetL502_1: L502.1 R502.2 | length 1046.5
  Top Layer w50: R502.2 -820,3205 -710,3315 -710,3517.52 L502.1
NetN501_2: N501.2 R511.1 R512.2 | length 914.7
  Bottom Layer w50: R511.1 -4204.92,4295 -4026.36,4295 -3967.92,4353.43 N501.2 -3822.92,4215 -3555,4215 R512.2
NetN501_3: N501.3 R513.2 | length 428.9
  Bottom Layer w50: N501.3 -3867.92,4458 R513.2
NetN501_6: N501.6 R508.1 R511.2 | length 4715.9
  Bottom Layer w50: R508.1 -5195,1574 -5589,1574 -5696,1681 -5696,2865.28 -5030.5,3530.78 -5030.5,3869.42 R511.2 -4174.92,4725 -3941,4725 -3876,4660 N501.6
NetN502_1: N502.1 RP502.1 | length 813.1
  MidLayer1 w30: N502.1 -3245,3755 -3065,3755 -3005,3815 -3005,4045 RP502.1
NetN502_3: N502.3 R516.2 | length 290.7
  Bottom Layer w20: N502.3 -3135,3565 -2920,3565 R516.2
NetN502_8: N502.8 RP502.3 | length 254.4
  MidLayer1 w40: N502.8 -3385,4035 RP502.3
NetN503_3: N503.3 R520.2 | length 270.4
  Top Layer w30: N503.3 -3446.92,2456.92 -3405,2415 R520.2
NetN504_2: N504.2 R521.1 R522.2 | length 434.4
  Top Layer w50: R521.1 -3652,1712 R522.2 ; R522.2@-3561.92,1712 N504.2
NetN504_3: N504.3 R523.2 | length 133.7
  Top Layer w50: R523.2 -3470.92,1832 N504.3
NetN504_6: N504.6 R519.2 R521.2 | length 435.9
  Top Layer w20: R521.2 -3715,2275 R519.2
  Bottom Layer w20: R519.2 -3595.92,2275 N504.6
NetP505_1: P505.1 RP503.2 | length 364.4
  Top Layer w30: RP503.2 -3020,2722.22 -2866.78,2569 -2801,2569 P505.1
NetP506_1: P506.1 RP504.2 | length 342.4
  Top Layer w30: RP504.2 -2917,1907 -2798,1907 P506.1
NetR503_1: R503.1 T501.3 | length 765.8
  Bottom Layer w75: T501.3 -4729,4471 R503.1
NetR503_2: R503.2 RP501.1 | length 381.5
  Bottom Layer w50: R503.2 -4462,4750 RP501.1
NetR504_1: R504.1 RP501.3 | length 1860.2
  Top Layer w50: R504.1 -4691.75,3215 -4597,3309.75 -4597,4746.41 -4393.41,4950 RP501.3
NetR504_2: R504.2 T502.3 | length 689.9
  Bottom Layer w75: T502.3 -5026,2382 R504.2
NetR505_1: R505.1 R507.2 T501.2 | length 2319.4
  Top Layer w75: R507.2 -5580,3820 T501.2
  Bottom Layer w75: R507.2 -5396.88,3274 -5108,3562.88 -5108,3947 R505.1
NetR506_2: R506.2 R508.2 T502.2 | length 1800
  Top Layer w75: R508.2 -5580,2247 T502.2
  Bottom Layer w75: R508.2 -5408.88,1689 -5007.88,2090 R506.2
NetR524_1: R524.1 U501.16 | length 133.6
  Bottom Layer w30: U501.16 -2276.25,1221.18 R524.1
NetR527_2: R527.2 RP501.2 | length 1511.3
  MidLayer1 w75: RP501.2 R527.2@-2887.36,4850
  Bottom Layer w30: R527.2@-2887.36,4850 R527.2@-2883.36,4846
NetR541_2: R541.2 T504.2 | length 298.8
  Bottom Layer w50: R541.2 -4110,3235 T504.2
NetR543_2: R543.2 T505.2 | length 307.6
  Bottom Layer w50: R543.2 -4246,2124 T505.2
SPICLK_DA: JP501.14A JP501.14B JP501.14C U501.11 | length 1375.2
  Top Layer w30: JP501.14A JP501.14B JP501.14C
  Bottom Layer w20: JP501.14C@-3153.54,407.07 JP501.14C -3086.63,466.91 -3086.63,958.87 -2996.5,1049 -2768.07,1049 -2648.2,1168.87 -2648.2,1211.93 U501.11
SPIDI_DA: JP501.15A JP501.15B JP501.15C U501.10 | length 1388.6
  Bottom Layer w20: JP501.15C -3121.63,531.91 -3121.63,973.36 -3010.99,1084 -2783.07,1084 -2694.7,1172.37 -2694.7,1215.43 U501.10
  Bottom Layer w50: JP501.15A JP501.15B JP501.15C
SPISTE_DA: JP501.13A JP501.13B JP501.13C U501.12 | length 1291.6
  Bottom Layer w20: JP501.13C -3051.63,401.91 -3051.63,944.37 -2982,1014 -2753.28,1014 -2641.28,1126 -2641.07,1126 -2598.2,1168.87
  Bottom Layer w50: JP501.13A JP501.13B JP501.13C
SW_3: JUMP503.1 K502.3 | length 1391.2
  MidLayer1 w30: K502.3 -5514,1240 -5360,1240 -4885,1715 -4560,1715 JUMP503.1
SW_5: JUMP503.2 K502.5 | length 1432.8
  MidLayer2 w30: K502.5 -5245,909 -5245,1380 -4850,1775 JUMP503.2
T503C: D503.1 K502.2 T503.1 | length 7172.1
  Bottom Layer w30: D503.1 -4706,1190 -5364,1190 K502.2 -5424,1170.63 -5503.69,1250.31 -5503.69,1363.01 -5381.69,1485 -4866.1,1485 -4861.47,1489.63 -3005.93,1489.63 -2908.1,1587.46 -2382.88,1587.46 -2342.88,1547.46 -1320,1547.46 -1154.17,1381.64 -1154.17,709.17 -1010,565 -701.4,565 -511.4,755 T503.1
test_0: C527.1 N502.6 R507.1 R512.1 R514.2 TEST.7 | length 4043.6
  MidLayer1 w50: R507.1 -4609,3745 -3730.92,3745 R514.2
  MidLayer2 w10: TEST.7 -3820,4925.55 -3820,4282.08 R514.2
  Bottom Layer w50: C527.1 R514.2 ; R514.2 -3495.92,3980 -3258.08,3980 -3193.08,3915 N502.6 -3005,4095 -3005,4305 R512.1
V_CTRL: R522.1 TEST.5 U501.6 | length 6645.7
  Top Layer w10: R522.1 -3881,1630 -3400,1630 -3140,1890 -3140,2573.88 -3145,2578.88 -3145,2877.29 -2805,3217.29 -2805,3355.36 -2655,3505.36 -2655,4090 -2830,4265 -2830,4529.64 -2850.36,4550 -3295.71,4550 -3564.7,4818.99 TEST.5@-3564.7,4991
  MidLayer1 w30: R522.1 -3731,1480 -3157.8,1480 v1@-2663,985.2 ; v1(-2663,974) v1@-2655.9,974
  Bottom Layer w30: v1(-2663,974) -2655.9,974 -2643,961.1 -2643,863.03 U501.6
pads on no net: K501.4 K501.7 K502.4 K502.8 K503.5 K503.7 K504.3 K505.3 N501.1 N501.5 N501.8 N502.5 N503.1 N503.5 N503.8 N504.1 N504.5 N504.8 P501.0 P503.0 P504.0 U501.2 U501.3 U501.7 U501.13

## Polygon pours and split planes (outlines as drawn)
AGND on MidLayer1 "MidLayer1-No Net" (hatched 90Degree grid 20 track 8, pour order 0): -5980,265 -5980,4730 -5635,5075 -745,5075 -280,4610 -280,40 -5755,40
DGND on MidLayer2 "DGND_L03_P002" (hatched 90Degree grid 20 track 8, pour order 2): -5996.06,35 -325,35 -325,4785.98 -584.58,5045.56 -5923.81,4991.39

## Keep-outs
Keep-Out Layer:
  circle w10: c-156.02,2400.63 r53.15
  circle w10: c-156.02,3740.63 r53.15
  circle w10: c-6141.02,2400.63 r53.15
  circle w10: c-6141.02,3740.63 r53.15
  circle w10: c-1656.02,100.63 r78.74
  circle w10: c-5156.02,100.63 r78.74
  circle w10: c-5629.65,4960.63 r53.15
  circle w10: c-671.02,4960.63 r53.15

## Other copper
Top Layer:
  rectangle net HIGH-IN6: -4990,160 -4820,434
  rectangle net HIGH-IN4: -4790,160 -4620,440
  rectangle net +26V: -1990,170 -1820,430
Bottom Layer:
  rectangle net 26VGND: -3690,165 -3420,435
  rectangle net FUS2: -2180,170 -2030,430

## Silkscreen, mask and mechanical layers (free items; w line width, h text height)
Top Overlay:
  lines w3.94: -196.85,0 181.77,0 ; 0,-300.79 0,196.85
  lines w10: -6298.94,4881.89 -5393.43,4881.89 -5157.2,5118.11 -5708.39,5118.11 ; -4820,1770 -4820,1905 ; -4775,1655 -4775,1775 ; -4700,1560 -4500,1560 ; -4700,1985 -4505,1985 ; -4425,1650 -4425,1775 ; -4390,1780 -4390,1900 ; -6299.94,4881.89 -5394.43,4881.89 -5158.2,5118.11 -5709.39,5118.11 -6299.94,4881.89 ; -1104.2,5118 -867.98,4881.78 -1.72,4881.89 -592.28,5118.11 -1104.2,5118
  lines w19.68: -6299.21,1880.79 -6299.21,4242.99 -5984.25,4242.99 -5984.25,1880.79 -6000,1880.79 -6299.21,1880.79 ; -319.21,1880.79 -4.25,1880.79 -4.25,4242.99 -319.21,4242.99 -319.21,1880.79
  text "+5V" at -3140,4800 h40 r90
  text "-5V" at -3250,4795 h40 r90
  text "DGND" at -3645,4755 h40 r90
  text "-2.5V" at -3442,4725 h40 r90
  text "+2.5V" at -3348,4724 h40 r90
  text "V_SIG" at -3739,4721 h40 r90
  text "V_CTRL" at -3535,4670 h40 r90
  text "24" at -4630,2000 h30
  text "160" at -4370,1875 h30 r270
  text "160" at -4835,1800 h30 r90
  text "24" at -4410,1740 h30 r270
  text "24" at -4790,1685 h30 r90
  text "160" at -4555,1545 h30 r180
  text "20180510" at -6125,1080 h59.06 r90
  text "0301-12" at -6100,320 h96 r90
Mechanical 1:
  circle w10: c-6141.73,3740.16 r53.15
  circle w10: c-5629.92,4960.63 r53.15
  circle w10: c-669.29,4960.63 r53.15
  circle w10: c-6141.73,2401.57 r53.15
  circle w10: c-157.48,2401.57 r53.15
  circle w10: c-157.48,3740.16 r53.15
  circle w10: c-5629.65,4960.63 r53.15
  lines w10: -6298.94,4881.89 -5708.39,5118.11 ; -589.19,5118.11 1.36,4881.89
  lines w19.68: -6299.21,196.85 -6102.36,0 -196.85,0 0,196.85 0,4881.89 -590.55,5118.11 -5708.66,5118.11 -6299.21,4881.89 -6299.21,196.85

## Text inside footprints (layer, text, board x,y; h text height)
JP501: Bottom Overlay "32" at -4934.54,125 h30; Bottom Overlay "30" at -4726.54,127 h30; Bottom Overlay "25" at -4227.54,125 h30; Bottom Overlay "20" at -3729.54,125 h30; Bottom Overlay "15" at -3229.54,128 h30; Bottom Overlay "10" at -2730.54,128 h30; Bottom Overlay "5" at -2238.54,125 h30; Bottom Overlay "1" at -1845.54,122 h30; Bottom Overlay "a" at -1782.54,199 h30; Bottom Overlay "b" at -1787.54,291 h30; Bottom Overlay "c" at -1789.54,393 h30; Bottom Overlay "c" at -5018.54,396 h30; Bottom Overlay "b" at -5013.54,294 h30; Bottom Overlay "a" at -5011.54,192 h30
K501: Top Overlay "4" at -1820,618 h72; Top Overlay "1" at -1810,813 h72; Top Overlay "3" at -1830,1018 h72; Top Overlay "8" at -1820,1223 h72; Top Overlay "7" at -1130,1238 h72; Top Overlay "2" at -1130,1018 h72; Top Overlay "6" at -1135,828 h72; Top Overlay "5" at -1130,603 h72
K502: Top Overlay "4" at -5874,685 h72; Top Overlay "1" at -5864,880 h72; Top Overlay "3" at -5884,1085 h72; Top Overlay "8" at -5874,1290 h72; Top Overlay "7" at -5184,1305 h72; Top Overlay "2" at -5184,1085 h72; Top Overlay "6" at -5189,895 h72; Top Overlay "5" at -5184,670 h72
K503: Top Overlay "4" at -4428,650 h72; Top Overlay "1" at -4418,845 h72; Top Overlay "3" at -4438,1050 h72; Top Overlay "8" at -4428,1255 h72; Top Overlay "7" at -3738,1270 h72; Top Overlay "2" at -3738,1050 h72; Top Overlay "6" at -3743,860 h72; Top Overlay "5" at -3738,635 h72
K504: Top Overlay "1" at -4084,3575 h40 r90; Top Overlay "2" at -3991,3561 h40 r90; Top Overlay "3" at -3884,3559 h40 r90; Top Overlay "4" at -3889,3964 h40 r90; Top Overlay "5" at -3988,3964 h40 r90; Top Overlay "6" at -4092,3964 h40 r90
K505: Top Overlay "1" at -4219,2470 h40 r90; Top Overlay "2" at -4126,2456 h40 r90; Top Overlay "3" at -4019,2454 h40 r90; Top Overlay "4" at -4024,2859 h40 r90; Top Overlay "5" at -4123,2859 h40 r90; Top Overlay "6" at -4227,2859 h40 r90
P501: Top Overlay "+OUT" at -2019,2166 h60 r180; Top Overlay "-OUT" at -2019,2576 h60 r180; Top Overlay "+IN" at -645,2267 h60 r180; Top Overlay "-IN" at -638,2478 h60 r180
T503: Top Overlay "e" at -655,810 h60; Top Overlay "c" at -445,810 h60; Top Overlay "b" at -465,625 h60
T504: Top Overlay "e" at -4120,3390 h60; Top Overlay "c" at -3910,3390 h60; Top Overlay "b" at -3930,3205 h60
T505: Top Overlay "e" at -4267,2279 h60; Top Overlay "c" at -4057,2279 h60; Top Overlay "b" at -4077,2094 h60